# Altium PCB LED_Matrix.PcbDoc (part 1 of 2)
Units mil, origin at the board's own origin, x right, y up, seen from the top; angles counter-clockwise.
Board outline 11090 x 4405 mil, 2 copper layers (Top Layer, Bottom Layer); 184 components, 244 nets, 878 pads, 83 vias.
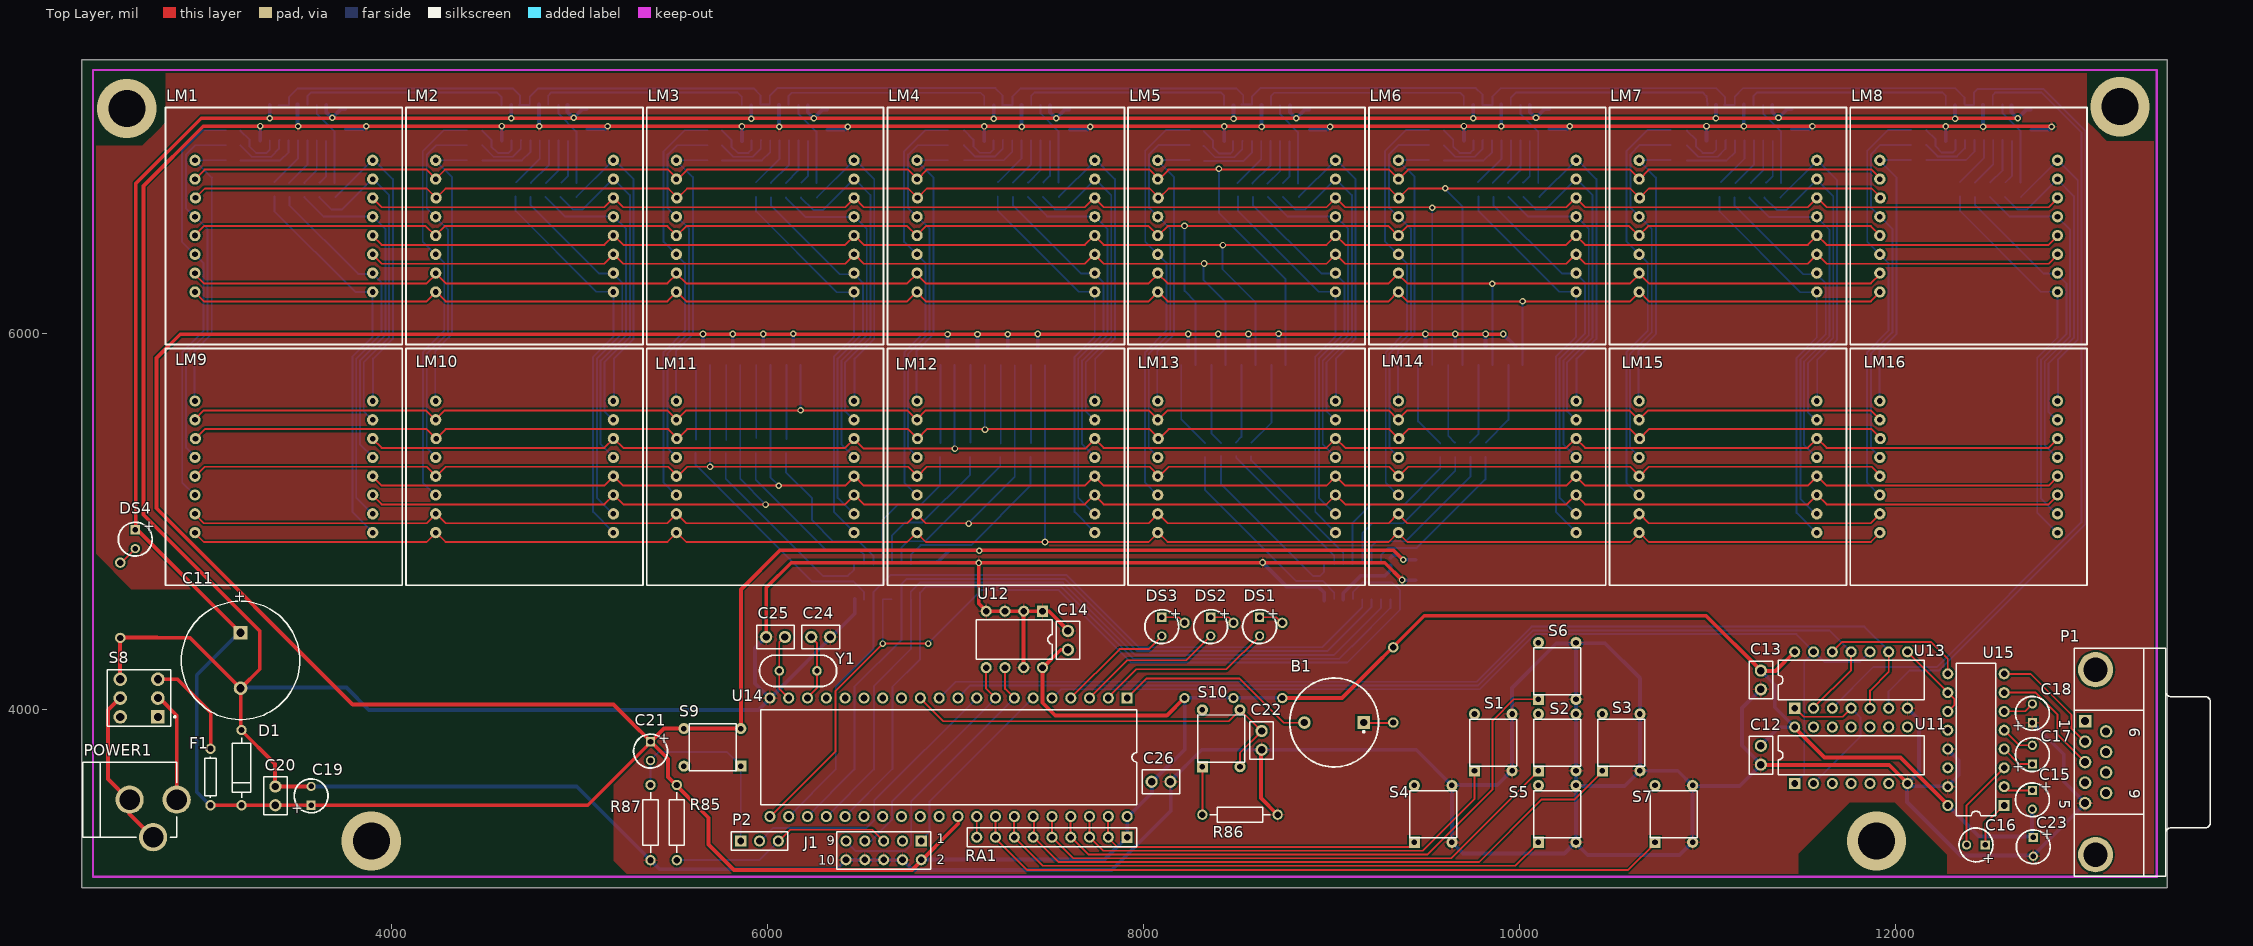
[diagram p0: Top Layer view]
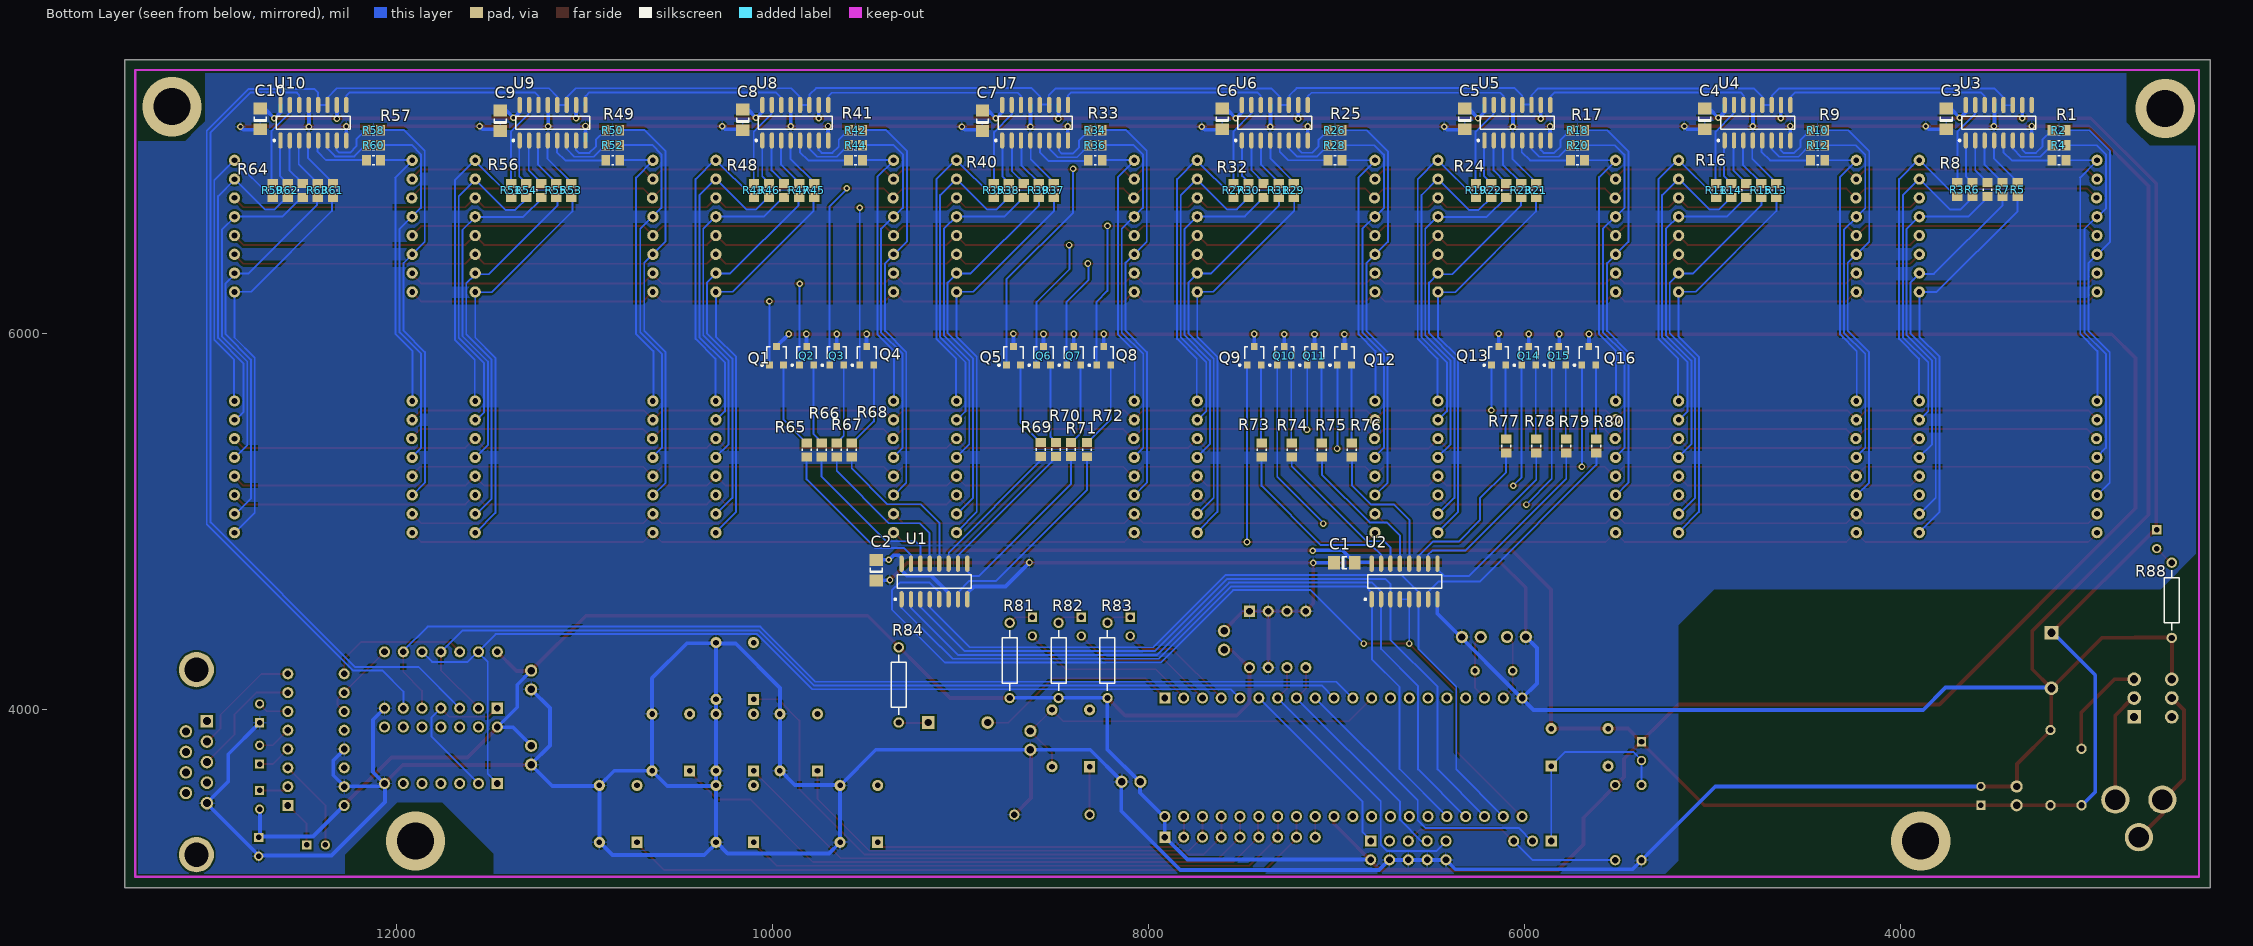
[diagram p1: Bottom Layer view, seen from below]

## Layer stack, top to bottom
Top Layer: signal copper 1.4
Dielectric: dielectric 12.6, FR-4, Dk 4.8
Bottom Layer: signal copper 1.4

## Board outline
2355,7455 13445,7455 13445,3050 2355,3050

## Design rules (kind name [scope] priority, off if disabled: settings)
Clearance [All] p1: gap=10
ComponentClearance [All] p1: gap=10 collisioncheckmode=3 verticalgap=10
HoleSize [All] p1: absolutevalues=TRUE maxlimit=350 minlimit=1 maxpercent=80.000 minpercent=20.000
PolygonConnect [All] p1: connectstyle=Relief reliefconductorwidth=10 reliefentries=4 polygonreliefangle="90 Angle"
RoutingVias [All] p1: holewidth=20 width=35 viastyle="Through Hole" minholewidth=10 minwidth=20 maxholewidth=314.96 maxwidth=393.7
SolderMaskExpansion [All] p1: expansion=4
TestPointUsage [All] p1: valid=0 allowmultiple=FALSE
Testpoint [All] p1: side=15 testpointundercomponent=TRUE minsize=40 maxsize=100 preferedsize=60 minholesize=0 maxholesize=40 preferedholesize=32 testpointgrid=1 style=1023 order=0-112345678
Width [All] p1: maxlimit=20 minlimit=10 preferedwidth=10
17 further rules are at their usual default settings.

## Components (designator, comment, footprint, x,y, rotation, side; value= is the part's Value field where it differs from the comment)
B1 "BEEP" Buzzer 9015,3930 r180 top
C1 "Cap Semi" C1206 6960,4780 r180 bottom
C2 "Cap Semi" C1206 9450,4740 r90 bottom
C3 "Cap Semi" C1206 3760,7140 r90 bottom
C4 "Cap Semi" C1206 5043,7140 r90 bottom
C5 "Cap Semi" C1206 6320,7140 r90 bottom
C6 "Cap Semi" C1206 7610,7140 r90 bottom
C7 "Cap Semi" C1206 8885,7130 r90 bottom
C8 "Cap Semi" C1206 10160,7135 r90 bottom
C9 "Cap Semi" C1206 11450,7130 r90 bottom
C10 "Cap Semi" C1206 12725,7140 r90 bottom
C11 "Cap Pol1" CAPPR7.5-16x35 3200,4260 r270 top
C12 "Cap" VP32-3.2 11285,3756 r270 top
C13 "Cap" VP32-3.2 11285,4156 r270 top
C14 "Cap" VP32-3.2 7600,4367 r90 top
C15 "CAP POL" CAP-LED 12729,3519 r270 top
C16 "CAP POL" CAP-LED 12429,3279 r180 top
C17 "CAP POL" CAP-LED 12729,3759 r90 top
C18 "CAP POL" CAP-LED 12729,3979 r90 top
C19 "CAP POL" CAP-LED 3575,3540 r90 top
C20 "Cap" CAP 3385,3540 r90 top
C21 "CAP POL" CAP-LED 5380,3778 r270 top
C22 "Cap" VP32-3.2 8630,3835 r270 top
C23 "CAP POL" CAP-LED 12734,3269 r270 top
C24 "Cap" CAP 6285,4385 r180 top
C25 "Cap" CAP 6045,4385 r0 top
C26 "Cap" VP32-3.2 8095,3615 r0 top
D1 "Diode 1N4001" DIODE-0.4 3205,3690 r270 top
DS1 "LED" CAP-LED 8619,4440 r270 top
DS2 "LED" CAP-LED 8359,4440 r270 top
DS3 "LED" CAP-LED 8099,4440 r270 top
DS4 "LED" CAP-LED 2640,4905 r270 top
F1 "FUSE1" AXIAL-0.3 3040,3640 r270 top
J1 "Header 5X2" HDR2X5 6820,3300 r180 top
LM1 "JM-M1088A-B" LEDMatrix8 4060,5940 r90 top
LM2 "JM-M1088A-B" LEDMatrix8 5340,5940 r90 top
LM3 "JM-M1088A-B" LEDMatrix8 6620,5940 r90 top
LM4 "JM-M1088A-B" LEDMatrix8 7900,5940 r90 top
LM5 "JM-M1088A-B" LEDMatrix8 9180,5940 r90 top
LM6 "JM-M1088A-B" LEDMatrix8 10460,5940 r90 top
LM7 "JM-M1088A-B" LEDMatrix8 11740,5940 r90 top
LM8 "JM-M1088A-B" LEDMatrix8 13020,5940 r90 top
LM9 "JM-M1088A-B" LEDMatrix8 4060,4660 r90 top
LM10 "JM-M1088A-B" LEDMatrix8 5340,4660 r90 top
LM11 "JM-M1088A-B" LEDMatrix8 6620,4660 r90 top
LM12 "JM-M1088A-B" LEDMatrix8 7900,4660 r90 top
LM13 "JM-M1088A-B" LEDMatrix8 9180,4660 r90 top
LM14 "JM-M1088A-B" LEDMatrix8 10460,4660 r90 top
LM15 "JM-M1088A-B" LEDMatrix8 11740,4660 r90 top
LM16 "JM-M1088A-B" LEDMatrix8 13020,4660 r90 top
P1 "RS232" DSUB1.385-2H9 13439,3719 r270 top
P2 "Header 3" HDR1X3 5860,3300 r0 top
POWER1 "POWER" Power 2860,3520 r0 top
Q1 "8550" SOT-23B 9980,5880 r180 bottom
Q2 "8550" SOT-23B 9820,5880 r180 bottom
Q3 "8550" SOT-23B 9660,5880 r180 bottom
Q4 "8550" SOT-23B 9500,5880 r180 bottom
Q5 "8550" SOT-23B 8720,5880 r180 bottom
Q6 "8550" SOT-23B 8560,5880 r180 bottom
Q7 "8550" SOT-23B 8400,5880 r180 bottom
Q8 "8550" SOT-23B 8240,5880 r180 bottom
Q9 "8550" SOT-23B 7440,5880 r180 bottom
Q10 "8550" SOT-23B 7280,5880 r180 bottom
Q11 "8550" SOT-23B 7120,5880 r180 bottom
Q12 "8550" SOT-23B 6960,5880 r180 bottom
Q13 "8550" SOT-23B 6140,5880 r180 bottom
Q14 "8550" SOT-23B 5980,5880 r180 bottom
Q15 "8550" SOT-23B 5820,5880 r180 bottom
Q16 "8550" SOT-23B 5660,5880 r180 bottom
R1 "RES" 0805 3160,6920 r180 bottom
R2 "RES" 0805 3160,7080 r180 bottom
R3 "RES" 0805 3700,6764 r270 bottom
R4 "RES" 0805 3160,7000 r180 bottom
R5 "RES" 0805 3380,6764 r270 bottom
R6 "RES" 0805 3620,6764 r270 bottom
R7 "RES" 0805 3460,6764 r270 bottom
R8 "RES" 0805 3540,6764 r270 bottom
R9 "RES" 0805 4443,6920 r180 bottom
R10 "RES" 0805 4443,7080 r180 bottom
R11 "RES" 0805 4983,6760 r270 bottom
R12 "RES" 0805 4443,7000 r180 bottom
R13 "RES" 0805 4663,6760 r270 bottom
R14 "RES" 0805 4903,6760 r270 bottom
R15 "RES" 0805 4743,6760 r270 bottom
R16 "RES" 0805 4823,6760 r270 bottom
R17 "RES" 0805 5720,6920 r180 bottom
R18 "RES" 0805 5720,7080 r180 bottom
R19 "RES" 0805 6260,6760 r270 bottom
R20 "RES" 0805 5720,7000 r180 bottom
R21 "RES" 0805 5940,6760 r270 bottom
R22 "RES" 0805 6180,6760 r270 bottom
R23 "RES" 0805 6020,6760 r270 bottom
R24 "RES" 0805 6100,6760 r270 bottom
R25 "RES" 0805 7010,6920 r180 bottom
R26 "RES" 0805 7010,7080 r180 bottom
R27 "RES" 0805 7550,6760 r270 bottom
R28 "RES" 0805 7010,7000 r180 bottom
R29 "RES" 0805 7230,6760 r270 bottom
R30 "RES" 0805 7470,6760 r270 bottom
R31 "RES" 0805 7310,6760 r270 bottom
R32 "RES" 0805 7390,6760 r270 bottom
R33 "RES" 0805 8285,6920 r180 bottom
R34 "RES" 0805 8285,7080 r180 bottom
R35 "RES" 0805 8825,6760 r270 bottom
R36 "RES" 0805 8285,7000 r180 bottom
R37 "RES" 0805 8505,6760 r270 bottom
R38 "RES" 0805 8745,6760 r270 bottom
R39 "RES" 0805 8585,6760 r270 bottom
R40 "RES" 0805 8665,6760 r270 bottom
R41 "RES" 0805 9560,6920 r180 bottom
R42 "RES" 0805 9560,7080 r180 bottom
R43 "RES" 0805 10100,6760 r270 bottom
R44 "RES" 0805 9560,7000 r180 bottom
R45 "RES" 0805 9780,6760 r270 bottom
R46 "RES" 0805 10020,6760 r270 bottom
R47 "RES" 0805 9860,6760 r270 bottom
R48 "RES" 0805 9940,6760 r270 bottom
R49 "RES" 0805 10851,6920 r180 bottom
R50 "RES" 0805 10851,7080 r180 bottom
R51 "RES" 0805 11391,6760 r270 bottom
R52 "RES" 0805 10851,7000 r180 bottom
R53 "RES" 0805 11071,6760 r270 bottom
R54 "RES" 0805 11311,6760 r270 bottom
R55 "RES" 0805 11151,6760 r270 bottom
R56 "RES" 0805 11231,6760 r270 bottom
R57 "RES" 0805 12123,6920 r180 bottom
R58 "RES" 0805 12123,7080 r180 bottom
R59 "RES" 0805 12659,6760 r270 bottom
R60 "RES" 0805 12123,7000 r180 bottom
R61 "RES" 0805 12339,6760 r270 bottom
R62 "RES" 0805 12579,6760 r270 bottom
R63 "RES" 0805 12419,6760 r270 bottom
R64 "RES" 0805 12499,6760 r270 bottom
R65 "RES" 0805 9820,5380 r90 bottom
R66 "RES" 0805 9740,5380 r90 bottom
R67 "RES" 0805 9660,5380 r90 bottom
R68 "RES" 0805 9580,5380 r90 bottom
R69 "RES" 0805 8574,5382 r90 bottom
R70 "RES" 0805 8494,5382 r90 bottom
R71 "RES" 0805 8414,5382 r90 bottom
R72 "RES" 0805 8329,5381 r90 bottom
R73 "RES" 0805 7400,5380 r90 bottom
R74 "RES" 0805 7240,5380 r90 bottom
R75 "RES" 0805 7080,5380 r90 bottom
R76 "RES" 0805 6920,5380 r90 bottom
R77 "RES" 0805 6100,5400 r90 bottom
R78 "RES" 0805 5940,5400 r90 bottom
R79 "RES" 0805 5780,5400 r90 bottom
R80 "RES" 0805 5620,5400 r90 bottom
R81 "RES" AXIAL-0.4 8740,4260 r270 bottom
R82 "RES" AXIAL-0.4 8480,4260 r270 bottom
R83 "RES" AXIAL-0.4 8220,4260 r270 bottom
R84 "RES" AXIAL-0.4 9330,4130 r90 bottom
R85 "RES" AXIAL-0.4 5520,3398 r270 top
R86 "RES" AXIAL-0.4 8515,3440 r0 top
R87 "RES" AXIAL-0.4 5380,3398 r90 top
R88 "RES" AXIAL-0.4 2560,4580 r270 bottom
RA1 "Res Arry" HDR1X9 7915,3320 r180 top
S1 "SW-PB" key 9762,3673 r90 top
S2 "SW-PB" key 10102,3673 r90 top
S3 "SW-PB" key 10442,3673 r90 top
S4 "SW-PB" key 9442,3293 r90 top
S5 "SW-PB" key 10102,3293 r90 top
S6 "SW-PB" key 10102,4053 r90 top
S7 "SW-PB" key 10722,3293 r90 top
S8 "SW-DPDT" SWITCH-6 2660,4060 r180 top
S9 "SW-PB" key 5860,3698 r180 top
S10 "SW-PB" key 8315,3695 r90 top
U1 "SN74HC138D" D016_N 9140,4680 r90 bottom
U2 "SN74HC138D" D016_N 6640,4680 r90 bottom
U3 "SN74HC595D" D016_N 3480,7120 r90 bottom
U4 "SN74HC595D" D016_N 4763,7120 r90 bottom
U5 "SN74HC595D" D016_N 6040,7120 r90 bottom
U6 "SN74HC595D" D016_N 7330,7120 r90 bottom
U7 "SN74HC595D" D016_N 8605,7120 r90 bottom
U8 "SN74HC595D" D016_N 9880,7120 r90 bottom
U9 "SN74HC595D" D016_N 11171,7120 r90 bottom
U10 "SN74HC595D" D016_N 12443,7120 r90 bottom
U11 "SN74AC04N" N014 11765,3756 r0 top
U12 "AT24C04" DIP-8 7315,4372 r180 top
U13 "SN74HC125N" N014 11765,4156 r0 top
U14 "Atmel89S52" ATMEL89S52-DIP40 7915,4060 r270 top
U15 "MAX232CPE" DIP-16 12429,3839 r90 top
Y1 "XTAL" XTAL 6165,4205 r0 top

## Footprints (in the part's own frame and the unit in brackets; to place one, negate y for a bottom-side part, rotate by r counter-clockwise, add the part's x,y. Pads: shape width x height; smd on the part's side, far side on the other; paste and mask are expansions set on the pad)
0805 [mm] "Chip Resistor, 2-Leads, Body 2.0x1.3mm, IPC Medium Density"
  rect 1.2x1.4 smd: 1(-0.95,0) 2(0.95,0)
  silkscreen extent -0.15,-0.6 0.15,0.6, body extent -1.1,-0.7 1.1,0.7, height 0.6
ATMEL89S52-DIP40 [mm]
  rect 1.5x1.5 hole 0.9: 1(0,0)
  round 1.5 hole 0.9: 2(0,-2.54) 3(0,-5.08) 4(0,-7.62) 5(0,-10.16) 6(0,-12.7) 7(0,-15.24) 8(0,-17.78) 9(0,-20.32) 10(0,-22.86) 11(0,-25.4) 12(0,-27.94) 13(0,-30.48) 14(0,-33.02) 15(0,-35.56) 16(0,-38.1) 17(0,-40.64) 18(0,-43.18) 19(0,-45.72) 20(0,-48.26) 21(16,-48.26) 22(16,-45.72) 23(16,-43.18) 24(16,-40.64) 25(16,-38.1) 26(16,-35.56) 27(16,-33.02) 28(16,-30.48) 29(16,-27.94) 30(16,-25.4) 31(16,-22.86) 32(16,-20.32) 33(16,-17.78) 34(16,-15.24) 35(16,-12.7) 36(16,-10.16) 37(16,-7.62) 38(16,-5.08) 39(16,-2.54) 40(16,0)
  silkscreen extent 1.59,-49.53 14.42,1.27
AXIAL-0.3 [mm]
  round 1.4 hole 0.85: 1(-3.81,0) 2(3.81,0)
  silkscreen extent -2.77,-0.76 2.77,0.76
AXIAL-0.4 [mm] "Resistor; 2 Leads"
  round 1.4 hole 0.85: 1(-5.08,0) 2(5.08,0)
  silkscreen extent -4.06,-1.02 4.06,1.02
Buzzer [mm] "Photosensitive Diode; 2 Leads"
  rect 1.7x1.7 hole 1: 1(-4,0)
  round 1.7 hole 1: 2(4,0)
  silkscreen extent -6.02,-6 5.98,6
C1206 [mm] "Chip Capacitor; Body 3.2 x 1.6 mm (LxW typ)"
  rect 1.6x1.8 smd: 1(-1.4,0) 2(1.4,0)
  silkscreen extent -0.3,-0.8 0.3,0.8
CAP [mm] "Capacitor, Ceramic, Thru-Hole, Dipped Radial; Body 5.1 x 3.2 mm (WxT) Pin Spacing 2.54 mm (typ)"
  round 1.65 hole 1: 1(-1.27,0) 2(1.27,0)
  silkscreen extent -2.55,-1.6 2.55,1.6
CAP-LED [mm] "Capacitor, Electrolytic, Radial; Body 5 x 6.8 mm (Dia.xH typ); Pin Spacing 2 mm (typ)"
  rect 1.25x1.25 hole 0.75: 1(-1.27,0)
  round 1.25 hole 0.75: 2(1.27,0)
  silkscreen extent -2.29,-2.28 2.29,2.29
CAPPR7.5-16x35 [mm] "Capacitor, Electrolytic, Radial; Body 16 x 35 mm (Dia.xH typ); Pin Spacing 7.5 mm (typ)"
  rect 1.85x1.85 hole 1.1: 1(-3.75,0)
  round 1.85 hole 1.1: 2(3.75,0)
  silkscreen extent -8,-8 8,8
D016_N [mm] "SOIC, 16-Leads, Body 9.9x3.9mm, Pitch 1.27mm, IPC Medium Density"
  oval 2.2x0.6 smd: 1(-2.4,4.445) 2(-2.4,3.175) 3(-2.4,1.905) 4(-2.4,0.635) 5(-2.4,-0.635) 6(-2.4,-1.905) 7(-2.4,-3.175) 8(-2.4,-4.445) 9(2.4,-4.445) 10(2.4,-3.175) 11(2.4,-1.905) 12(2.4,-0.635) 13(2.4,0.635) 14(2.4,1.905) 15(2.4,3.175) 16(2.4,4.445)
  silkscreen extent -2.52,-5 0.9,5.42, body extent -2,-5 2,5, height 1.75
DIODE-0.4 [mm] "Tunnel Diode - Dependent Source Model; 2 Leads"
  round 1.4 hole 0.85: 1(-5.08,0) 2(5.08,0)
  silkscreen extent -4.06,-1.27 4.06,1.27
DIP-8 [mm] "DIP; 8 Leads; Row Spacing 7.62 mm; Pitch 2.54 mm"
  rect 1.5x1.5 hole 0.9: 1(-3.81,-3.81)
  round 1.5 hole 0.9: 2(-1.27,-3.81) 3(1.27,-3.81) 4(3.81,-3.81) 5(3.81,3.81) 6(1.27,3.81) 7(-1.27,3.81) 8(-3.81,3.81)
  silkscreen extent -5.15,-2.65 5.15,2.65
DIP-16 [mm] "DIP; 16 Leads; Row Spacing 7.62 mm; Pitch 2.54 mm"
  rect 1.5x1.5 hole 0.9: 1(-8.89,-3.81)
  round 1.5 hole 0.9: 2(-6.35,-3.81) 3(-3.81,-3.81) 4(-1.27,-3.81) 5(1.27,-3.81) 6(3.81,-3.81) 7(6.35,-3.81) 8(8.89,-3.81) 9(8.89,3.81) 10(6.35,3.81) 11(3.81,3.81) 12(1.27,3.81) 13(-1.27,3.81) 14(-3.81,3.81) 15(-6.35,3.81) 16(-8.89,3.81)
  silkscreen extent -10.3,-2.65 10.3,2.65
DSUB1.385-2H9 [mm] "Connector; D Subminiature; 9 Position; Right Angle; Pitch 1.385 mm"
  rect 1.69x1.69 hole 1.09: 1(-5.54,-10.92)
  round 1.69 hole 1.09: 2(-2.77,-10.92) 3(0,-10.92) 4(2.77,-10.92) 5(5.54,-10.92) 6(-4.155,-8.08) 7(-1.385,-8.08) 8(1.385,-8.08) 9(4.155,-8.08)
  round 4.76 hole 3.26: 10(-12.495,-9.5) 11(12.495,-9.5)
  silkscreen extent -15.4,-12.4 15.4,6
HDR1X3 [mm] "Connector; Header; 3 Position"
  rect 1.5x1.5 hole 0.9: 1(0,0)
  round 1.5 hole 0.9: 2(2.54,0) 3(5.08,0)
  silkscreen extent -1.27,-1.27 6.35,1.27
HDR1X9 [mm] "Connector; Header; 9 Position"
  rect 1.5x1.5 hole 0.9: 1(0,0)
  round 1.5 hole 0.9: 2(2.54,0) 3(5.08,0) 4(7.62,0) 5(10.16,0) 6(12.7,0) 7(15.24,0) 8(17.78,0) 9(20.32,0)
  silkscreen extent -1.27,-1.27 21.59,1.27
HDR2X5 [mm] "Connector; Header; 5x2 Position"
  rect 1.5x1.5 hole 0.9: 1(0,0)
  round 1.5 hole 0.9: 2(0,2.54) 3(2.54,0) 4(2.54,2.54) 5(5.08,0) 6(5.08,2.54) 7(7.62,0) 8(7.62,2.54) 9(10.16,0) 10(10.16,2.54)
  silkscreen extent -1.27,-1.27 11.43,3.81
key [mm]
  rect 1.5x1.5 hole 0.75: 1(0,0)
  round 1.5 hole 0.75: 2(0,-5.08) 2(7.68,-5.08) ""(7.68,0)
  silkscreen extent 0.64,-5.71 6.98,0.64
LEDMatrix8 [mil]
  round 60 hole 30: 1(279.92,157.48) 2(379.92,157.48) 3(479.92,157.48) 4(579.92,157.48) 5(679.92,157.48) 6(779.92,157.48) 7(879.92,157.48) 8(979.92,157.48) 9(979.92,1102.36) 10(879.92,1102.36) 11(779.92,1100) 12(679.92,1102.36) 13(579.92,1102.36) 14(479.92,1102.36) 15(379.92,1102.36) 16(279.92,1102.36)
  silkscreen extent 0,0 1260,1260
N014 [mm] "DIP; 14 Leads; Row Spacing 7.62 mm; Pitch 2.54 mm"
  rect 1.5x1.5 hole 0.9: 1(-7.62,-3.81)
  round 1.5 hole 0.9: 2(-5.08,-3.81) 3(-2.54,-3.81) 4(0,-3.81) 5(2.54,-3.81) 6(5.08,-3.81) 7(7.62,-3.81) 8(7.62,3.81) 9(5.08,3.81) 10(2.54,3.81) 11(0,3.81) 12(-2.54,3.81) 13(-5.08,3.81) 14(-7.62,3.81)
  silkscreen extent -9.85,-2.65 9.85,2.65
Power [mil]
  round 150 hole 110: 1(0,0) 2(-250,0) 2(-125,-200)
  silkscreen extent -500,-200 0,200
SOT-23B [mm] "SOT-23; 3 Leads; Body 3.0 x 2.6 mm, inc. leads (LxW max)"
  rect 0.9x0.95 smd: 1(-0.95,-1.25) 2(0.95,-1.25) 3(0,1.25)
  silkscreen extent -2.08,-1.37 1.3,1.25
SWITCH-6 [mm] "Double-Pole, Double-Throw Switch; 6 Leads"
  round 1.85 hole 1.1: 1(-2.54,0) 3(-2.54,-2.54) 4(2.54,0) 5(2.54,2.54) 6(2.54,-2.54)
  rect 1.85x1.85 hole 1.1: 2(-2.54,2.54)
  silkscreen extent -4.96,-3.81 4.28,3.81
VP32-3.2 [mm] "Capacitor, Ceramic, Thru-Hole, Dipped Radial; Body 5.1 x 3.2 mm (WxT) Pin Spacing 2.54 mm (typ)"
  round 1.65 hole 1: 1(-1.27,0) 2(1.27,0)
  silkscreen extent -2.55,-1.6 2.55,1.6
XTAL [mm] "Crystal, Thru-Hole; 2 Leads; Body 3.1 x 8.2 mm (Dia.xH)"
  round 1.3 hole 0.7: 1(-2.54,0) 2(2.54,0)
  silkscreen extent -5.2,-2.11 5.2,2.11

## Part data
C1 C2: "Capacitor (Semiconductor SIM Model)"
C3 C4 C5 C6 C7 C8 C9 C10 C11: library part Cap, "Capacitor"
C12 C13 C14 C20 C22 C24 C25 C26: "Capacitor"
C15 C16 C17 C18 C19 C21 C23: "Polarized Capacitor (Axial)"
D1: "1 Amp General Purpose Rectifier"
J1: "Header, 5-Pin, Dual row"
LM1 LM2 LM3 LM4 LM5 LM6 LM7 LM8 LM9 LM10 LM11 LM12 LM13 LM14 LM15 LM16: library part "LED Matrix 8"
P1: library part "D Connector 9", "Receptacle Assembly, 9 Position, Right Angle"
P2: "Header, 3-Pin"
Q1 Q2 Q3 Q4 Q5 Q6 Q7 Q8 Q9 Q10 Q11 Q12 Q13 Q14 Q15 Q16: library part 2N3906, "PNP General Purpose Amplifier"
R1 R2 R3 R4 R5 R6 R7 R8 R9 R10 R11 R12 R13 R14 R15 R16 R17 R18 R19 R20 R21 R22 R23 R24 R25 R26 R27 R28 R29 R30 R31 R32 R33 R34 R35 R36 R37 R38 R39 R40 R41 R42 R43 R44 R45 R46 R47 R48 R49 R50 R51 R52 R53 R54 R55 R56 R57 R58 R59 R60 R61 R62 R63 R64 R65 R66 R67 R68 R69 R70 R71 R72 R73 R74 R75 R76 R77 R78 R79 R80 R81 R82 R83 R84 R85 R86 R87 R88: "Resistor"
S8: "Double-Pole, Double-Throw Switch"
U1 U2: "3-Line to 8-Line Decoder / Demultiplexer"
U3 U4 U5 U6 U7 U8 U9 U10: library part SN74HC595N, "8-Bit Shift Register with 3-State Output Registers"
U11: "Hex Inverter"
U13: "Quadruple Bus Buffer Gate with 3-State Outputs"
U15: library part MAX232
Y1: "Crystal Oscillator"

## Via types
v1: diameter 35, hole 20, Top Layer to Bottom Layer, 79 vias
v2: diameter 314.96, hole 196.85, Top Layer to Bottom Layer, 4 vias

## Nets (pads, with @x,y where several pads share a name; then routed paths per layer and width w, separated by ;. In a path a pad name is that pad's centre, name@x,y a point inside that pad or via, vN(x,y) a via of type N, cw(c..) or ccw(c..) an arc to the next point about the centre after c; other vN are vias at no path point)
A: U1.1 U2.1 U14.25 | length 4187.8
  Bottom Layer w10: U14.25@6415,3431 6667,3683 6667,4119 6814,4266 6814,4621 6847,4654 7563,4654 7948,4269 9043,4269 9109,4335 9111,4335 9315,4539 U1.1@9315,4585.51
B: U1.2 U2.2 U14.24 | length 4207.7
  Bottom Layer w10: U14.24@6317,3430 6568,3681 6568,4124 6765,4321 U2.2@6765,4585.51 ; U2.2@6764,4588 6764,4625 6813,4674 7573,4674 7958,4289 9013,4289 9265,4541 U1.2@9265,4585.51
C: U1.3 U2.3 U14.23 | length 4250.7
  Bottom Layer w10: U14.23@6213,3430 6464,3681 6464,4120 6715,4371 U2.3@6715,4585.51 ; U2.3@6714,4588 6714,4666 6742,4694 7584,4694 7968.38,4309.62 8978.62,4309.62 9215,4546 U1.3@9215,4585.51
CLK: U3.11 U3.12 U4.11 U4.12 U5.11 U5.12 U6.11 U6.12 U7.11 U7.12 U8.11 U8.12 U9.11 U9.12 U10.11 U10.12 U13.6 | length 14262
  Bottom Layer w10: U3.11@3401,7213 3458,7213 3458,7257 3502,7301 4649,7301 4685,7265 U4.11@4685,7216 ; U4.11@4681,7214 4738,7214 4738,7258 4782,7302 5929,7302 5965,7266 U5.11@5965,7217 ; U5.11@5966,7216 6014,7216 6014,7264 6054,7304 7214,7304 7252,7266 U6.11@7252,7219 ; U6.11@7248,7214 7305,7214 7305,7258 7349,7302 8496,7302 8532,7266 U7.11@8532,7217 ; U7.11@8522,7216 8579,7216 8579,7260 8623,7304 9770,7304 9804,7270 9804,7215 9857,7215 9857,7259 9901,7303 11048,7303 11095,7256 U9.11@11095,7218 ; U9.11@11089,7215 11146,7215 11146,7259 11190,7303 12318,7303 12368,7253 U10.11@12368,7218 ; U13.6@11964,4009 11964,4095 12075,4206 12231,4206 13010,4985 13010,7078 12788,7300 12438,7300 12418,7280 U10.12@12418,7215 ; U10.11@12371.51,7214.49 U10.12@12418,7214.49
D: U1.4 U2.6 U14.22 | length 4307.4
  Bottom Layer w10: U14.22@6114,3430 6365,3681 6365,4120 6565,4320 U2.6@6565,4585.51 ; U2.6@6565,4586 6565,4624 6655,4714 7593,4714 7977,4330 8952,4330 9165,4543 U1.4@9165,4585.51
DATA: U10.14 U13.3 | length 4427.5
  Bottom Layer w10: U13.3@11664,4006 11884,4226 12222,4226 12990,4994 12990,7069 12779,7280 12531,7280 12518,7267 U10.14@12518,7214.49
EN: U1.5 U2.4 U2.5 U14.21 | length 5026.9
  Top Layer w10: U14.21@6015,3427 6364,3776 6364,4098 6616,4350 v1(6857,4350)
  Bottom Layer w10: v1(6615,4350) U2.5@6615,4585.51 U2.4@6662.51,4585.51 ; v1@6857.5,4351.5 7140,4634 7552,4634 7937,4249 9084,4249 9366,4531 9366,4633 9325,4674 9165,4674 9115,4624 U1.5@9115,4585.51
GND: C1.1 C2.1 C3.1 C4.1 C5.1 C6.1 C7.1 C8.1 C9.1 C10.1 C11.2 C12.2 C13.2 C14.2 C18.1 C19.2 C20.2 C22.2 C23.2 C24.1 C25.1 C26.2 D1.1 J1.4 J1.6 J1.8 J1.10 P1.5 R86.2 R87.1 R88.2 S1.2 S2.2 S3.2 S4.2 S5.2 S6.2 S7.2 S8.6 U1.8 U2.8 U3.8 U3.13 U4.8 U4.13 U5.8 U5.13 U6.8 U6.13 U7.8 U7.13 U8.8 U8.13 U9.8 U9.13 U10.8 U10.13 U11.7 U12.1 U12.2 U12.3 U12.4 U12.7 U13.7 U14.20 U15.13 U15.15 | length 44498.3
  Top Layer w20: S8.6@2559,4160 2559,4382 2561,4384 2757,4384 ; R88.2@2561,4381 2931,4381 3201,4111 3201,3892 3383,3710 C20.2@3383,3586 ; C11.2@3200,4114 3203,4114 3302,4213 3302,4417 2684,5035 2684,6784 3001,7101 v1@12833,7101 ; C20.2@3385,3590 C19.2@3575,3590 ; C25.1@5996,4385 5996,4648 6128,4780 9285,4780 v1@9379,4686 ; v1(7126,4779) 7126,4563 7167,4522 7499,4522 C14.2@7601,4420 ; U12.7@7364,4222 U12.2@7364,4524 ; C22.2@8626,3785 8626,3528 R86.2@8715,3439 ; C12.2@11286,3704 11968,3704 U11.7@12066,3606
  Bottom Layer w20: C11.2@3194,4116 3763,4116 3882,3997 5954,3997 6466,4509 U2.8@6466,4588 ; U3.8@3305,7025 v1(3305,7102) ; v1@3503,7103 U3.13@3503,7217 ; C19.2@3575,3590 4988,3590 5428,3150 6371,3150 6420,3199 6722,3199 6776,3145 7833,3145 8147,3459 C26.2@8147,3613 ; C3.1@3760,7084.88 3853.88,7084.88 v1@3868,7099 ; U4.8@4589,7025 v1(4589,7102) ; v1@4787,7103 U4.13@4787,7217 ; C4.1@5044,7084.88 5137.88,7084.88 v1@5152,7099 ; U5.8@5866,7023 v1(5866,7100) ; C25.1@5995,4385 5936,4326 5936,4138 6014,4060 U14.20@6016,4060 ; v1@6064,7101 U5.13@6064,7215 ; C5.1@6321,7082.88 6414.88,7082.88 v1@6429,7097 ; C1.1@7015.12,4780 v1@7124,4780 ; U6.8@7155,7023 v1(7155,7100) ; v1@7353,7101 U6.13@7353,7215 ; C6.1@7610,7082.88 7703.88,7082.88 v1@7718,7097 ; C26.2@8143,3616 8312,3785 9452,3785 9643,3594 S4.2@9643,3293 ; U7.8@8431,7023 v1(8431,7100) ; v1@8629,7101 U7.13@8629,7215 ; v1(8635,4781) 8762,4654 8930,4654 8963,4621 U1.8@8963,4577 ; C7.1@8886,7082.88 8979.88,7082.88 v1@8994,7097 ; v1@9379,4686 C2.1@9450,4686 ; S4.2@9637,3598 9883,3598 9962,3677 S1.2@9962,3975.36 ; S4.2@9644,3294 9644,3291 9701,3234 10240,3234 S5.2@10300,3294 ; U8.8@9706,7025 v1(9706,7102) ; v1@9904,7103 U8.13@9904,7217 ; S1.2@9961,3981 9961,4114 10197,4350 10302,4350 10302,3295 S5.2@10299,3292 ; C8.1@10161,7084.88 10254.88,7084.88 v1@10269,7099 ; S5.2@10297,3292 10364,3225 10852,3225 10922,3295 S7.2@10922,3595.36 ; S5.2@10299,3593 10561,3593 10642,3674 10642,4166 10457,4351 S6.2@10303,4351 ; S3.2@10641,3674 10843,3674 10924,3593 11173,3593 C12.2@11285,3705 ; U9.8@10996,7025 v1(10996,7102) ; v1@11194,7103 U9.13@11194,7217 ; C12.2@11285,3708 11185,3808 11185,4007 C13.2@11285,4107 ; C9.1@11451,7084.88 11544.88,7084.88 v1@11559,7099 ; U11.7@12062,3602 12062,3507 12346,3223 12734,3223 P1.5@13010,3499 ; U11.7@12063,3603 12126,3666 12126,3945 U13.7@12065,4006 ; U11.7@12066,3602 12077,3591 12278,3591 12337,3650 12337,3728 U15.13@12281,3784 ; U10.8@12268,7023 v1(12268,7100) ; U15.13@12278,3790 U15.13@12287,3790 ; v1@12466,7101 U10.13@12466,7215 ; C10.1@12723,7082.88 12816.88,7082.88 v1@12831,7097 ; C18.1@12729,3929 12729,3928 12896,3761 12896,3616 P1.5@13010,3502
  other v1: 9377,4688 6065,7099 6429,7099 7354,7099 7718,7099 8630,7099 8994,7099 12467,7099 12831,7099 3506,7101 3868,7101 4788,7101 5152,7101 9905,7101 10269,7101 11195,7101 11559,7101
H1: LM1.16 LM2.16 LM3.16 LM4.16 LM5.16 LM6.16 LM7.16 LM8.16 Q1.1 | length 9591.6
  Top Layer w10: LM1.16@2957.64,6219.92 2957.64,6217.36 3005,6170 4190,6170 4240,6220 4290,6170 5470,6170 5520,6220 5570,6170 6745,6170 6795,6220 6845,6170 8030,6170 8080,6220 8130,6170 9305,6170 9355,6220 9405,6170 10590,6170 10640,6220 10690,6170 11870,6170 LM8.16@11920,6220
  Bottom Layer w10: Q1.1@10017.4,5830.79 v1@10017.4,6168.6
  other v1: 10018,6170
H1': R65.1 U1.15 | length 883.9
  Bottom Layer w10: U1.15@9264,4778 9264,4819 9304,4859 9456,4859 9820,5223 R65.1@9820,5342.6
H2: LM1.15 LM2.15 LM3.15 LM4.15 LM5.15 LM6.15 LM7.15 LM8.15 Q2.1 | length 9689.7
  Top Layer w10: LM1.15@2957.64,6312.36 3005,6265 4190,6265 LM2.15@4240,6315 ; LM2.15@4237,6320 4292,6265 5470,6265 5520,6315 5570,6265 6745,6265 6795,6315 6845,6265 8030,6265 8080,6315 8130,6265 9305,6265 9355,6315 9405,6265 10590,6265 10640,6315 10690,6265 11870,6265 LM8.15@11920,6315
  Bottom Layer w10: v1(9857,6264) 9857.4,6263.6 Q2.1@9857.4,5830.79
H2': R66.1 U1.14 | length 878.9
  Bottom Layer w10: U1.14@9214,4773 9214,4867 9241,4894 9397,4894 9740,5237 R66.1@9740,5342.6
H3: LM1.11 LM2.11 LM3.11 LM4.11 LM5.11 LM6.11 LM7.11 LM8.11 Q3.1 | length 10229.3
  Top Layer w10: LM1.11@2960,6720 3010,6770 4190,6770 4240,6720 4290,6770 5475,6770 5525,6720 5575,6770 6750,6770 6800,6720 6850,6770 8035,6770 8085,6720 8135,6770 9310,6770 9360,6720 9410,6770 10590,6770 10640,6720 10690,6770 11875,6770 11922.36,6722.64 LM8.11@11922.36,6720.08
  Bottom Layer w10: v1@9605,6768 9697.4,6675.6 Q3.1@9697.4,5830.79
  other v1: 9607,6771
H3': R67.1 U1.13 | length 869.7
  Bottom Layer w10: U1.13@9166,4773 9166,4937 9219,4990 9382,4990 9660,5268 R67.1@9660,5342.6
H4: LM1.6 LM2.6 LM3.6 LM4.6 LM5.6 LM6.6 LM7.6 LM8.6 Q4.1 | length 10090.6
  Top Layer w10: LM1.6@3902.64,6717.36 3950,6670 5135,6670 5185,6720 5235,6670 6415,6670 6465,6720 6515,6670 7690,6670 7740,6720 7790,6670 8975,6670 9025,6720 9075,6670 10250,6670 10300,6720 10350,6670 11535,6670 11585,6720 11635,6670 12815,6670 LM8.6@12865,6720
  Bottom Layer w10: v1@9537,6670 9537.4,6669.6 Q4.1@9537.4,5830.79
  other v1: 9537,6667
H4': R68.1 U1.12 | length 866.1
  Bottom Layer w10: U1.12@9113,4773 9113,4990 9214,5091 9390,5091 9580,5281 R68.1@9580,5342.6
H5: LM1.10 LM2.10 LM3.10 LM4.10 LM5.10 LM6.10 LM7.10 LM8.10 Q5.1 | length 10437.1
  Top Layer w10: LM1.10@2960,6820 3010,6870 ; 3008,6871 4188,6871 ; 4190,6870 LM2.10@4237,6823 ; LM2.10@4236,6822 4239,6822 4288,6871 5473,6871 ; 5475,6870 5525,6820 5575,6870 ; 5573,6871 6748,6871 ; 6750,6870 6800,6820 6850,6870 ; 6848,6871 8033,6871 ; 8035,6870 8085,6820 8135,6870 ; 8133,6871 9308,6871 ; 9310,6870 9360,6820 9410,6870 ; 9408,6871 10588,6871 ; 10590,6870 10640,6820 10690,6870 ; 10688,6871 11873,6871 ; 11875,6870 11922.36,6822.64 LM8.10@11922.36,6820.08
  Bottom Layer w10: v1@8403,6870 8403,6641 8757.4,6286.6 Q5.1@8757.4,5830.79
  other v1: 8403,6875
H5': R69.1 U1.11 | length 774.6
  Bottom Layer w10: R69.1@8574,5344.6 8574,5324 9064,4834 U1.11@9064,4773
H6: LM1.4 LM2.4 LM3.4 LM4.4 LM5.4 LM6.4 LM7.4 LM8.4 Q6.1 | length 9962.1
  Top Layer w10: LM1.4@3902.64,6517.36 3950,6470 5135,6470 5185,6520 5235,6470 6415,6470 6465,6520 6515,6470 7690,6470 7740,6520 7790,6470 8975,6470 9025,6520 9075,6470 10250,6470 10300,6520 10350,6470 11535,6470 11585,6520 11635,6470 12815,6470 LM8.4@12865,6520
  Bottom Layer w10: v1@8422,6469 8422,6341 8597.4,6165.6 Q6.1@8597.4,5830.79
  other v1: 8424,6469
H6': R70.1 U1.10 | length 790.8
  Bottom Layer w10: R70.1@8495,5347 8495,5337 9016,4816 U1.10@9016,4772
H7: LM1.3 LM2.3 LM3.3 LM4.3 LM5.3 LM6.3 LM7.3 LM8.3 Q7.1 | length 9838.1
  Top Layer w10: LM1.3@3902.64,6417.36 3950,6370 5135,6370 5185,6420 5235,6370 6415,6370 6465,6420 6515,6370 7690,6370 7740,6420 7790,6370 8975,6370 9025,6420 9075,6370 10250,6370 10300,6420 10350,6370 11535,6370 11585,6420 11635,6370 12815,6370 LM8.3@12865,6420
  Bottom Layer w10: v1@8320,6369 8320,6285 8437.4,6167.6 Q7.1@8437.4,5830.79
  other v1: 8324,6371
H7': R71.1 U1.9 | length 945.3
  Bottom Layer w10: R71.1@8413,5347 8413,5201 8905,4709 8939,4709 8962,4732 U1.9@8962,4769
H8: LM1.13 LM2.13 LM3.13 LM4.13 LM5.13 LM6.13 LM7.13 LM8.13 Q8.1 | length 10016.8
  Top Layer w10: LM1.13@2955,6520 3005,6570 4185,6570 4235,6520 4285,6570 5470,6570 5520,6520 5570,6570 6745,6570 6795,6520 6845,6570 8030,6570 8080,6520 8130,6570 9305,6570 9355,6520 9405,6570 10585,6570 10635,6520 10685,6570 11870,6570 11917.36,6522.64 LM8.13@11917.36,6520.08
  Bottom Layer w10: v1@8220,6570 8220,6225 8277.4,6167.6 Q8.1@8277.4,5830.79
  other v1: 8220,6571
H8': R72.1 U1.7 | length 1124.7
  Bottom Layer w10: R72.1@8329,5343.6 8329,5165.31 8811.31,4683 8954,4683 9016,4621 U1.7@9016,4587
H9: LM9.16 LM10.16 LM11.16 LM12.16 LM13.16 LM14.16 LM15.16 LM16.16 Q9.1 | length 10193.4
  Top Layer w10: LM9.16@2957.64,4939.92 2957.64,4937.36 3005,4890 4190,4890 4240,4940 4290,4890 5470,4890 5520,4940 5570,4890 6745,4890 6795,4940 6845,4890 8030,4890 8080,4940 8130,4890 9305,4890 9355,4940 9405,4890 10590,4890 10640,4940 10690,4890 11870,4890 LM16.16@11920,4940
  Bottom Layer w10: v1@7477.4,4889.4 Q9.1@7477.4,5829
  other v1: 7478,4890
H9': R73.1 U2.15 | length 990.8
  Bottom Layer w10: U2.15@6765,4773 6765,4823 6816,4874 7086,4874 7400,5188 R73.1@7400,5342.6
H10: LM9.15 LM10.15 LM11.15 LM12.15 LM13.15 LM14.15 LM15.15 LM16.15 Q10.1 | length 10194.3
  Top Layer w10: LM9.15@2957.64,5039.92 2957.64,5037.36 3005,4990 4190,4990 4240,5040 4290,4990 5470,4990 5520,5040 5570,4990 6745,4990 6795,5040 6845,4990 8030,4990 8080,5040 8130,4990 9305,4990 9355,5040 9405,4990 10590,4990 10640,5040 10690,4990 11870,4990 LM16.15@11920,5040
  Bottom Layer w10: v1@7070,4990 7317.4,5237.4 Q10.1@7317.4,5828
  other v1: 7072,4988
H10': R74.1 U2.14 | length 838.8
  Bottom Layer w10: U2.14@6714,4775 6714,4859 6749,4894 6840,4894 7240,5294 R74.1@7240,5342.6
H11: LM9.11 LM10.11 LM11.11 LM12.11 LM13.11 LM14.11 LM15.11 LM16.11 Q11.1 | length 9593
  Top Layer w10: LM9.11@2960,5440 3010,5490 4190,5490 4240,5440 4290,5490 5475,5490 5525,5440 5575,5490 6750,5490 6800,5440 6850,5490 8035,5490 8085,5440 8135,5490 9310,5490 9360,5440 9410,5490 10590,5490 10640,5440 10690,5490 11875,5490 11922.36,5442.64 LM16.11@11922.36,5440.08
  Bottom Layer w10: v1@7157.4,5491.6 Q11.1@7157.4,5830.79
  other v1: 7159,5488
H11': R75.1 U2.13 | length 792.6
  Bottom Layer w10: U2.13@6664,4775 6664,4922 6736,4994 6826,4994 7080,5248 R75.1@7080,5342.6
H12: LM9.6 LM10.6 LM11.6 LM12.6 LM13.6 LM14.6 LM15.6 LM16.6 Q12.1 | length 9701.2
  Top Layer w10: LM9.6@3902.64,5439.92 3902.64,5437.36 3950,5390 5135,5390 5185,5440 5235,5390 6415,5390 LM11.6@6465,5440 ; LM11.6@6463,5437 6513,5387 7693,5387 LM12.6@7743,5437 ; LM12.6@7740,5440 7790,5390 8975,5390 9025,5440 9075,5390 10250,5390 10300,5440 10350,5390 11535,5390 11585,5440 11635,5390 12815,5390 LM16.6@12865,5440
  Bottom Layer w10: v1@6997.4,5388.4 Q12.1@6997.4,5830.79
  other v1: 6999,5387
H12': R76.1 U2.12 | length 768.2
  Bottom Layer w10: U2.12@6613,4773 6613,5006 6696,5089 6818,5089 6920,5191 R76.1@6920,5342.6
H13: LM9.10 LM10.10 LM11.10 LM12.10 LM13.10 LM14.10 LM15.10 LM16.10 Q13.1 | length 9490
  Top Layer w10: LM9.10@2955,5540 3005,5590 4185,5590 4235,5540 4285,5590 5470,5590 5520,5540 5570,5590 6745,5590 6795,5540 6845,5590 8030,5590 8080,5540 8130,5590 9305,5590 9355,5540 9405,5590 10585,5590 10635,5540 10685,5590 11870,5590 11917.36,5542.64 LM16.10@11917.36,5540.08
  Bottom Layer w10: v1@6177.4,5594.6 Q13.1@6177.4,5830.79
  other v1: 6178,5591
H13': R77.1 U2.11 | length 866.5
  Bottom Layer w10: R77.1@6100,5362.6 6100,5261 6239,5122 6239,5006 6353,4892 6490,4892 6565,4817 U2.11@6565,4769
H14: LM9.4 LM10.4 LM11.4 LM12.4 LM13.4 LM14.4 LM15.4 LM16.4 Q14.1 | length 9917.7
  Top Layer w10: LM9.4@3902.64,5239.92 3902.64,5237.36 3950,5190 5135,5190 5185,5240 5235,5190 6415,5190 6465,5240 6515,5190 7690,5190 7740,5240 7790,5190 8975,5190 9025,5240 9075,5190 10250,5190 10300,5240 10350,5190 11535,5190 11585,5240 11635,5190 12815,5190 LM16.4@12865,5240
  Bottom Layer w10: LM10.4@5180,5240 LM10.4@5185,5240 ; Q14.1@6017.4,5830.79 6017.4,5235.6 v1@6062.5,5190.5
  other v1: 6062,5189
H14': R78.1 U2.10 | length 927.7
  Bottom Layer w10: R78.1@5940,5362.6 5940,5222 6318,4844 6493,4844 6516,4821 U2.10@6516,4776
H15: LM9.3 LM10.3 LM11.3 LM12.3 LM13.3 LM14.3 LM15.3 LM16.3 Q15.1 | length 10052.1
  Top Layer w10: LM9.3@3902.64,5139.92 3902.64,5137.36 3950,5090 5135,5090 5185,5140 5235,5090 6415,5090 6465,5140 6515,5090 7690,5090 7740,5140 7790,5090 8975,5090 9025,5140 9075,5090 10250,5090 10300,5140 10350,5090 11535,5090 11585,5140 11635,5090 12815,5090 LM16.3@12865,5140
  Bottom Layer w10: Q15.1@5857.4,5830.79 5857.4,5225.6 v1@5994,5089
  other v1: 5992,5089
H15': R79.1 U2.9 | length 1075
  Bottom Layer w10: R79.1@5780,5362.6 5780,5226 6296,4710 6430,4710 6463,4743 U2.9@6463,4771
H16: LM9.13 LM10.13 LM11.13 LM12.13 LM13.13 LM14.13 LM15.13 LM16.13 Q16.1 | length 9790
  Top Layer w10: LM9.13@2960,5240 3010,5290 4190,5290 4240,5240 4290,5290 5475,5290 5525,5240 5575,5290 6750,5290 6800,5240 6850,5290 8035,5290 8085,5240 8135,5290 9310,5290 9360,5240 9410,5290 10590,5290 10640,5240 10690,5290 11875,5290 11922.36,5242.64 LM16.13@11922.36,5240.08
  Bottom Layer w10: v1@5697.4,5294.6 Q16.1@5697.4,5830.79
  other v1: 5697,5290
H16': R80.1 U2.7 | length 1277.6
  Bottom Layer w10: R80.1@5620,5362.6 5620,5300 6241,4679 6461,4679 6516,4624 U2.7@6516,4585
L1: LM1.9 LM9.9 R1.2 | length 1521.3
  Bottom Layer w10: LM9.9@2955,5640 2955,5905 3046.44,5996.44 3046.44,6829 ; LM1.9@2955,6921 2956,6920 R1.2@3122.6,6920 ; LM1.9@2957.64,6917.36 3047,6828
L2: LM1.14 LM9.14 R2.2 | length 2235.2
  Bottom Layer w10: LM9.14@2955,5140 2890,5205 2890,5900 3003,6013 3003,6373 LM1.14@2955,6421 ; LM1.14@2957,6417 2888,6486 2888,6968 3000,7080 R2.2@3122.6,7080
L3: LM1.8 LM9.8 R3.2 | length 1643.5
  Bottom Layer w10: R3.2@3704.5,6724.5 LM1.8@3900,6920 ; LM9.8@3905,5645 3905,5865 4010,5970 4010,6820 LM1.8@3905,6925
L4: LM1.12 LM9.12 R4.2 | length 1961.6
  Bottom Layer w10: LM1.12@2957,6617 2909,6665 2909,6950 2959,7000 R4.2@3122.6,7000 ; LM1.12@2959.92,6619.92 3024.03,6555.81 3024.03,6004.03 2910,5890 2910,5390 LM9.12@2960,5340
L5: LM1.1 LM9.1 R5.2 | length 2140.7
  Bottom Layer w10: R5.2@3380,6727 3380,6650 3810,6220 3902.52,6220 3902.52,5982.52 3795,5875 3795,5050 LM9.1@3900,4945
L6: LM1.7 LM9.7 R6.2 | length 1771.1
  Top Layer w10: LM9.7@3902.52,5544.92 LM9.7@3904.92,5544.92
  Bottom Layer w10: R6.2@3619,6724 3685,6658 3738,6658 LM1.7@3900,6820 ; LM9.7@3900,5540 3855,5585 3855,5845 3990,5980 3990,6735 LM1.7@3902.52,6822.48
L7: LM1.2 LM9.2 R7.2 | length 2021.5
  Bottom Layer w10: R7.2@3460,6724 3460,6681 3825,6316 LM1.2@3899,6316 ; LM9.2@3900,5040 3815,5125 3815,5865 3950,6000 3950,6270 LM1.2@3902.52,6317.48
L8: LM1.5 LM9.5 R8.2 | length 1800
  Bottom Layer w10: R8.2@3539,6724 3642,6621 LM1.5@3901,6621 ; LM1.5@3902.52,6622.48 3970,6555 3970,5990 3835,5855 3835,5410 LM9.5@3905,5340
L9: LM2.9 LM10.9 R9.2 | length 1523.5
  Bottom Layer w10: LM10.9@4235,5640 4235,5905 4324,5994 4324,6832 LM2.9@4238,6918 ; LM2.9@4236,6921 4237,6920 R9.2@4403.6,6920 ; 4310,5975 4310,5980
L10: LM2.14 LM10.14 R10.2 | length 2256.6
  Bottom Layer w10: LM10.14@4235,5140 4170,5205 4170,5900 4283.22,6013.22 4283.22,6375.78 LM2.14@4238,6421 ; LM2.14@4237.64,6419.92 LM2.14@4260.08,6419.92 ; LM2.14@4238,6417 4169,6486 4169,6968 4281,7080 R10.2@4403.6,7080
L11: LM2.8 LM10.8 R11.2 | length 1643.5
  Bottom Layer w10: R11.2@4986.5,6725.5 LM2.8@5182,6921 ; LM10.8@5185,5645 5185,5865 5290,5970 5290,6820 LM2.8@5185,6925
L12: LM2.12 LM10.12 R12.2 | length 1963.6
  Bottom Layer w10: LM2.12@4236,6618 4304,6550 4304,6004 4190,5890 4190,5390 LM10.12@4240,5340 ; LM2.12@4237.64,6619.92 LM2.12@4239.92,6619.92 ; LM2.12@4238,6617 4190,6665 4190,6950 4240,7000 R12.2@4403.6,7000
L13: LM2.1 LM10.1 R13.2 | length 2143.2
  Bottom Layer w10: R13.2@4662,6728 4662,6651 5092,6221 LM2.1@5184.52,6221 ; LM10.1@5180,4945 5075,5050 5075,5875 5182.52,5982.52 LM2.1@5182.52,6222.52
L14: LM2.7 LM10.7 R14.2 | length 1768.7
  Bottom Layer w10: R14.2@4901,6725 4967,6659 5020,6659 LM2.7@5182,6821 ; LM10.7@5180,5540 5135,5585 5135,5845 5270,5980 5270,6735 LM2.7@5182.52,6822.48